# EAGLE board board (EAGLE 9.7.0)
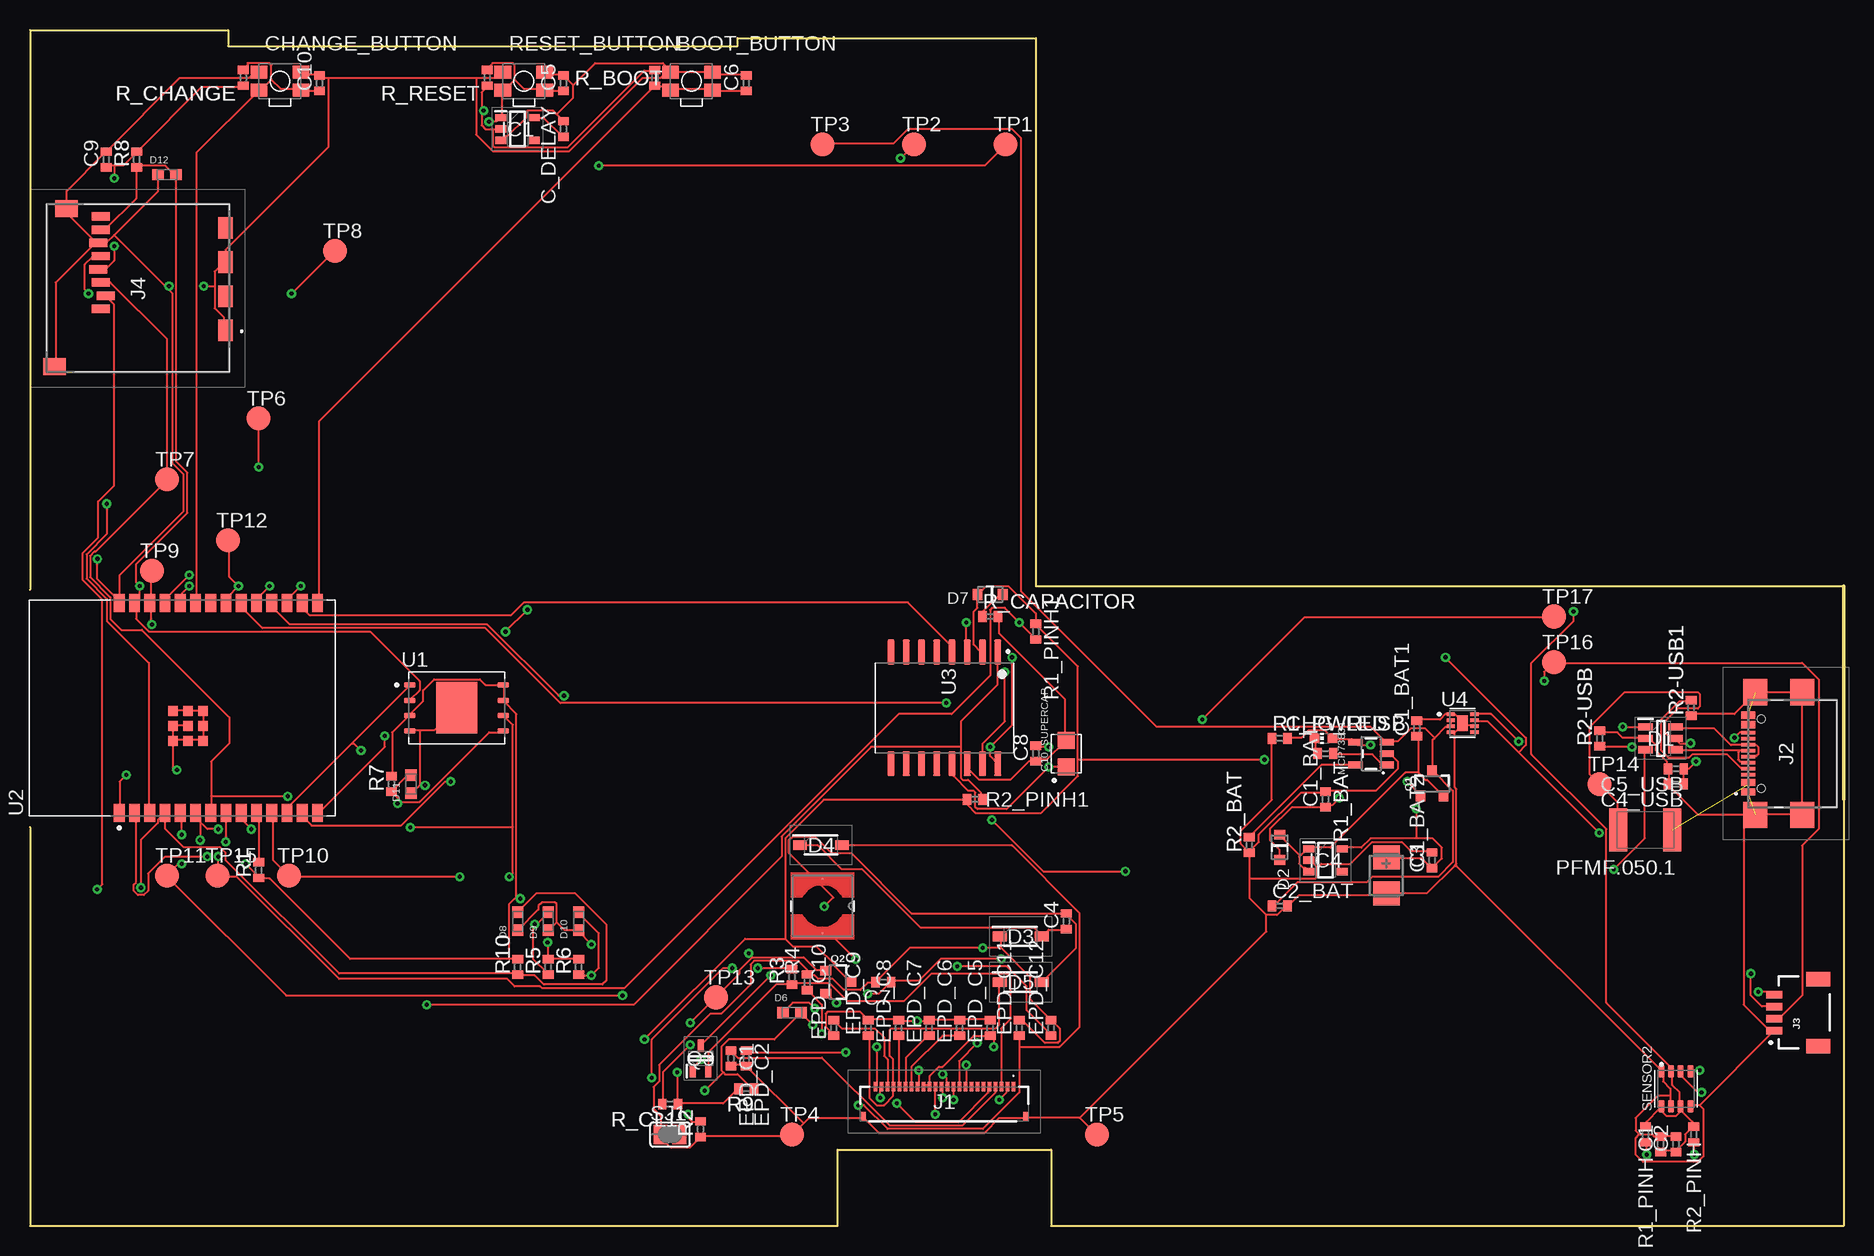
[diagram p0: board, top side]
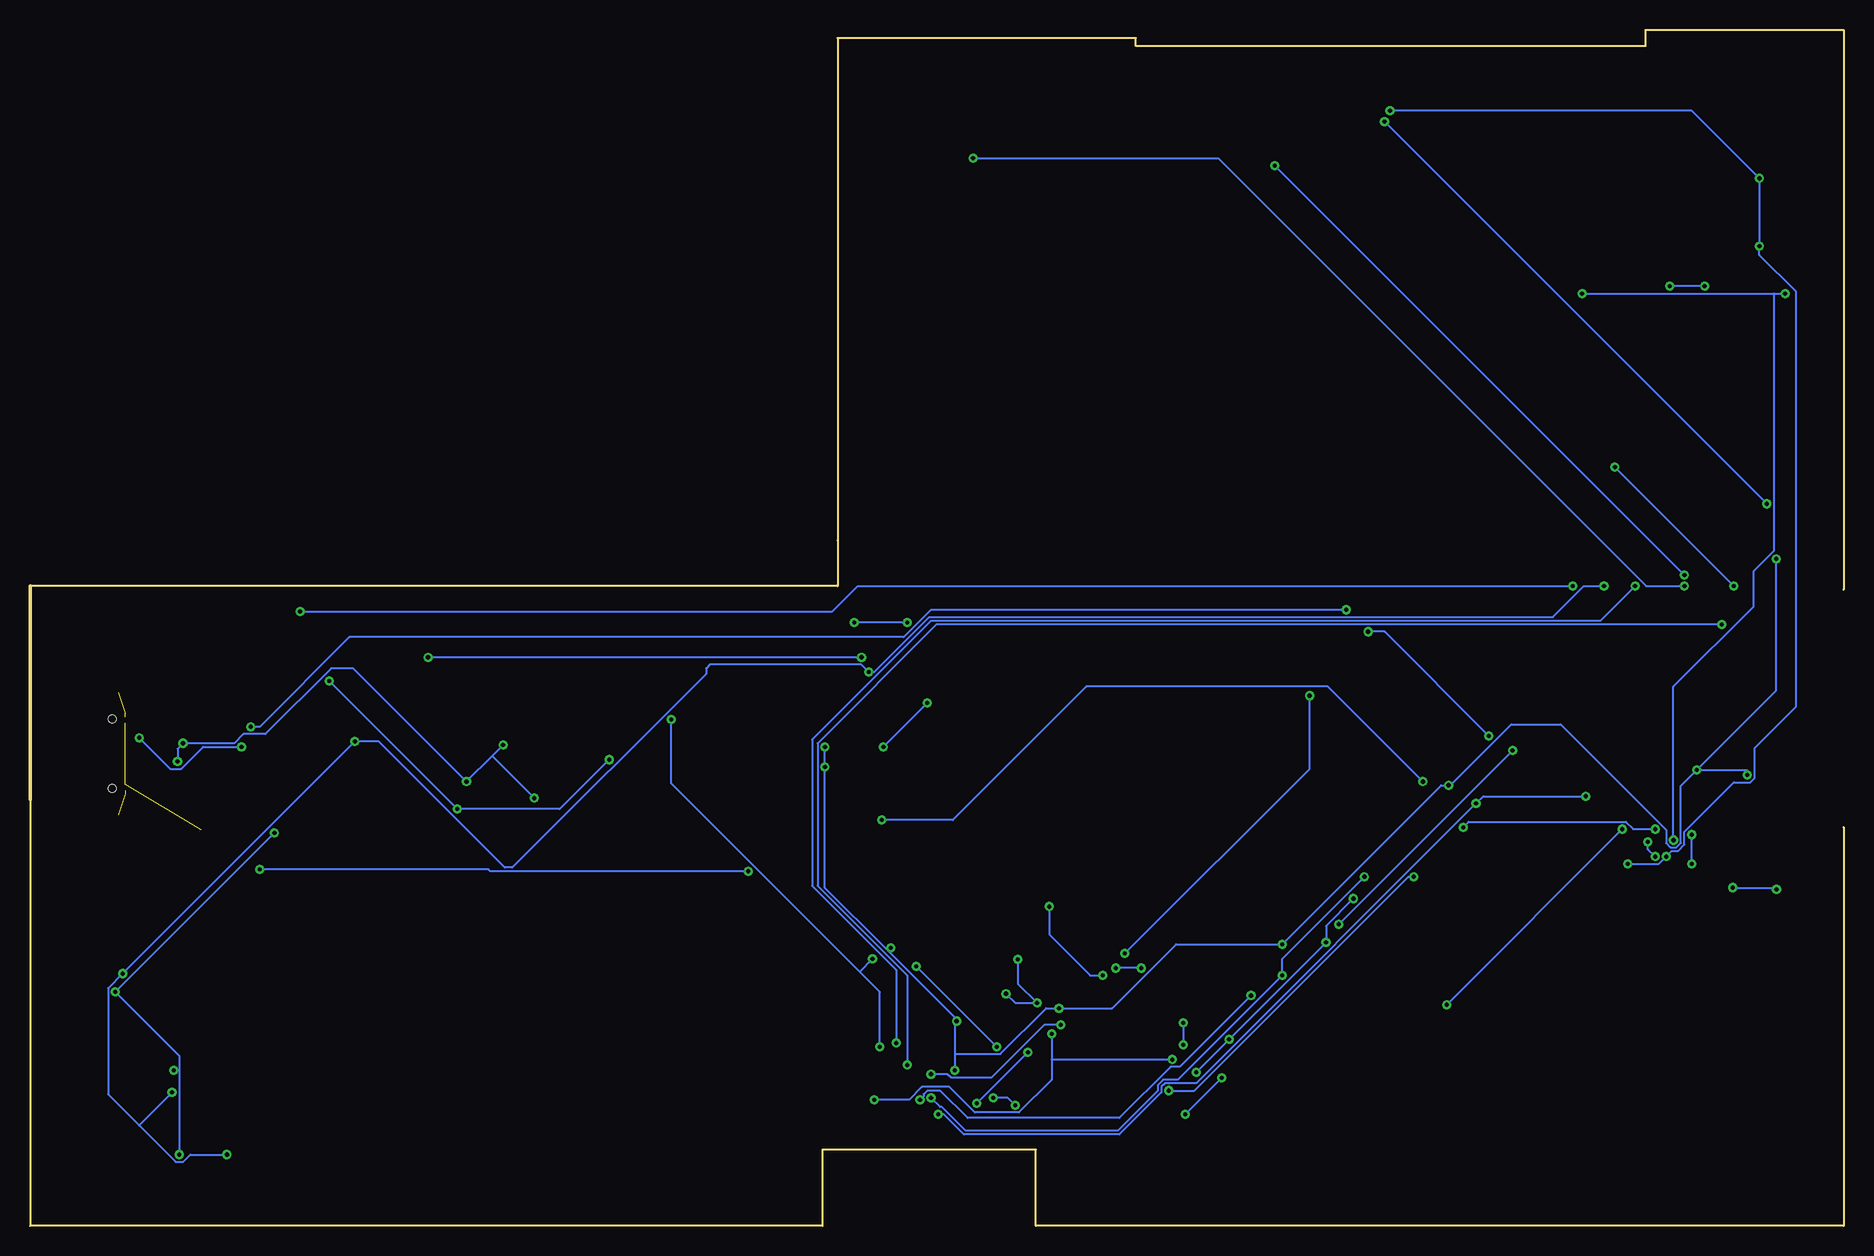
[diagram p1: board, bottom side, seen from below]

Size 151.13 x 99.69 mm. Coordinates in mm from the lower left corner, seen from the top.
Outline: 151.13,51.27 151.13,53.34 83.82,53.34 83.82,57.15 83.82,99.02 58.97,99.02 58.97,98.35 16.51,98.35 16.51,99.69 0,99.69 0,53.03
Outline: 151.13,51.27 151.13,50.8
Outline: 151.13,50.8 151.13,51.27
Outline: 151.13,50.8 151.13,35.56 151.13,0 85.09,0 85.09,6.35 67.31,6.35 67.31,0 0,0 0,33.23
Copper layers (1*16): Top 0.035mm / dielectric 1.5mm / Bottom 0.035mm
Design rules "Fusion Electronics Design Rules": minimum track width 6mil, minimum drill 0.35mm, track to track 6mil, track to pad 6mil, pad to pad 6mil, via to via 6mil, smd to smd 6mil, copper to edge 40mil, drill to drill 6mil, minimum pad ring 10mil, minimum via ring 8mil, stop-mask expansion 4mil, vias tented up to drill 9999mil, thermal gap 10mil

## Footprints (pad centres in the part's own frame; a part is rotated, then mirrored left to right if it is on the bottom)
MYBUTTON = smd 1.4 x 1.05: 1 1.75,0.75; 2 -1.75,0.75; 3 -1.75,-0.75; 4 1.75,-0.75
EAGLE-LTSPICE_C0402 = smd 0.7 x 0.9: 1 -0.65,0; 2 0.65,0
RCL_CT3528 = smd 2 x 2.2: + -1.5,0; - 1.5,0
CAPCP3225X100N = smd 1.4 x 1.4: 1 -1.1,0; 2 1.1,0
ADAFRUIT_CHIP-LED0603 = smd 0.8 x 0.8: A 0,-0.75; C 0,0.75
SOT95P280X145-6N = smd 1.2 x 0.6: 1 -1.25,0.95; 2 -1.25,0; 3 -1.25,-0.95; 4 1.25,-0.95; 5 1.25,0; 6 1.25,0.95
ESP32_WROVER_AVX---SD0805S020S1R0_AVX_SD0805S020S1R0_0 = smd 0.8 x 0.9: 1 -1.05,0; 2 1.05,0
SOD3716X135N = smd 1.15 x 0.8: 1 -1.75,0; 2 1.75,0
DIOC1608X36N = smd 0.97 x 0.94: 1 -0.75,0; 2 0.75,0
ESP32_WROVER_EAGLE-LTSPICE_C0402 = smd 0.7 x 0.9: 1 -0.65,0; 2 0.65,0
SOT95P280X125-5N = smd 0.9 x 0.6: 1 -1.4,0.95; 2 -1.4,0; 3 -1.4,-0.95; 4 1.4,-0.95; 5 1.4,0.95
SOT95P280X120-5N = smd 0.9 x 0.6: 1 -1.4,0.95; 2 -1.4,0; 3 -1.4,-0.95; 4 1.4,-0.95; 5 1.4,0.95
FH34SRJ24S05SH99 = smd 0.3 x 0.8: 1 5.75,1.45; 2 5.25,1.45; 3 4.75,1.45; 4 4.25,1.45; 5 3.75,1.45; 6 3.25,1.45; 7 2.75,1.45; 8 2.25,1.45; 9 1.75,1.45; 10 1.25,1.45; 11 0.75,1.45; 12 0.25,1.45; 13 -0.25,1.45; 14 -0.75,1.45; 15 -1.25,1.45; 16 -1.75,1.45; 17 -2.25,1.45; 18 -2.75,1.45; 19 -3.25,1.45; 20 -3.75,1.45; 21 -4.25,1.45; 22 -4.75,1.45; 23 -5.25,1.45; 24 -5.75,1.45 | smd 0.4 x 0.8: MP1 6.75,-1.05; MP2 -6.75,-1.05
SAMACSYS_PARTS_USB4110GFA = smd 0.3 x 1.15: A1 -3.35,3.678; A4 -2.55,3.678; A5 -1.25,3.678; A6 -0.25,3.678; A7 0.25,3.678; A8 1.25,3.678; A9 2.55,3.678; A12 3.35,3.678; B1 3.05,3.678; B4 2.25,3.678; B5 1.75,3.678; B6 0.75,3.678; B7 -0.75,3.678; B8 -1.75,3.678; B9 -2.25,3.678; B12 -3.05,3.678 | smd 2.18 x 2: MP1 -5.11,-0.827; MP2 5.11,-0.827; MP3 -5.11,3.103; MP4 5.11,3.103 | hole 0.65: -2.89,2.603; 2.89,2.603
JST04_1MM_RA = smd 0.6 x 1.35: 1 -1.5,0; 2 -0.5,0; 3 0.5,0; 4 1.5,0 | smd 1.2 x 2: NC1 2.8,-3.675; NC2 -2.8,-3.675
112ATAARR03ATTEND = smd 1.8 x 1.2: G1 10.6,10.4; G2 4.9,10.4; S1 7.75,10.4; S2 2.05,10.4 | smd 1.4 x 1.9: G3 13.6,-3.85; G4 0.45,-2.85 | smd 0.7 x 1.5: P1 8.8,0; P2 7.7,0.4; P3 6.6,0; P4 5.5,-0.2; P5 4.4,0; P6 3.3,-0.2; P7 2.2,0; P8 1.1,0
IND_4828-WE-TPC_WRE = smd 0.127 x 0.127: 1 -2.286,0; 2 2.286,0
ESP32_WROVER_SPARKFUN-IC-POWER_SOT23-5 = smd 0.55 x 1.2: 1 -0.95,-1.3; 2 0,-1.3; 3 0.95,-1.3; 4 0.95,1.3; 5 -0.95,1.3
ESP32C6_VARISTOR_CT/CN1812 = smd 1.5 x 3.6: 1 -2.25,0; 2 2.25,0
ESP32_WROVER_SPARKFUN-DISCRETESEMI_SOT23-3 = smd 0.8 x 0.9: 1 -0.95,-1; 2 0.95,-1; 3 0,1.1
SOT65P210X110-3N = smd 1.05 x 0.5: 1 -1.05,0.65; 2 -1.05,-0.65; 3 1.05,0
ESP32_WROVER_EAGLE-LTSPICE_R0402 = smd 0.7 x 0.9: 1 -0.65,0; 2 0.65,0
ESP32_WROVER_BME680_PSON80P300X300X100-8N = smd 1.016 x 0.5: 1 1.458,1.2; 2 1.458,0.4; 3 1.458,-0.4; 4 1.458,-1.2; 5 -1.458,-1.22; 6 -1.458,-0.4; 7 -1.458,0.4; 8 -1.458,1.2
SJ = smd 1.168 x 1.6: 1 -0.762,0; 2 0.762,0
TP20R = smd 2 x 2: TP 0,0
SON127P600X800X80-9N = smd 0.94 x 0.44: 1 -3.895,1.905; 2 -3.895,0.635; 3 -3.895,-0.635; 4 -3.895,-1.905; 5 3.895,-1.905; 6 3.895,-0.635; 7 3.895,0.635; 8 3.895,1.905 | smd 3.4 x 4.3: 9 0,0
XCVR_ESP32-C6-WROOM-1-N8 = smd 1.5 x 0.9: 1 -8.75,5.26; 2 -8.75,3.99; 3 -8.75,2.72; 4 -8.75,1.45; 5 -8.75,0.18; 6 -8.75,-1.09; 7 -8.75,-2.36; 8 -8.75,-3.63; 9 -8.75,-4.9; 10 -8.75,-6.17; 11 -8.75,-7.44; 12 -8.75,-8.71; 13 -8.75,-9.98; 14 -8.75,-11.25; 15 8.75,-11.25; 16 8.75,-9.98; 17 8.75,-8.71; 18 8.75,-7.44; 19 8.75,-6.17; 20 8.75,-4.9; 21 8.75,-3.63; 22 8.75,-2.36; 23 8.75,-1.09; 24 8.75,0.18; 25 8.75,1.45; 26 8.75,2.72; 27 8.75,3.99; 28 8.75,5.26 | smd 0.8 x 0.8: 29_1 -2.755,0.79; 29_2 -1.505,0.79; 29_3 -0.255,0.79; 29_4 -2.755,-0.46; 29_5 -1.505,-0.46; 29_6 -0.255,-0.46; 29_7 -2.755,-1.71; 29_8 -1.505,-1.71; 29_9 -0.255,-1.71
SOIC127P1032X265-16N = smd 2.05 x 0.59: 1 -4.655,4.445; 2 -4.655,3.175; 3 -4.655,1.905; 4 -4.655,0.635; 5 -4.655,-0.635; 6 -4.655,-1.905; 7 -4.655,-3.175; 8 -4.655,-4.445; 9 4.655,-4.445; 10 4.655,-3.175; 11 4.655,-1.905; 12 4.655,-0.635; 13 4.655,0.635; 14 4.655,1.905; 15 4.655,3.175; 16 4.655,4.445
SON50P200X200X80-9N = smd 0.76 x 0.27: 1 -0.985,0.75; 2 -0.985,0.25; 3 -0.985,-0.25; 4 -0.985,-0.75; 5 0.985,-0.75; 6 0.985,-0.25; 7 0.985,0.25; 8 0.985,0.75 | smd 0.9 x 1.3: 9 0,0

## Placement (x,y rotation side)
BOOT_BUTTON  BUTTON_CUSYOMV1  [MYBUTTON]  55.12,95.42 0 top
C1  100nF  [EAGLE-LTSPICE_C0402]  135.89,6.8 90 top
C1_BAT  4.7uF  [EAGLE-LTSPICE_C0402]  107.95,35.56 90 top
C1_BAT1  4.7uF  [EAGLE-LTSPICE_C0402]  115.57,41.46 90 top
C1_BAT2  4.7uF  [EAGLE-LTSPICE_C0402]  116.84,30.48 90 top
C2  100nF  [EAGLE-LTSPICE_C0402]  137.16,6.8 90 top
C2_BAT  4.7uF  [EAGLE-LTSPICE_C0402]  104.14,26.67 0 top
C3  100uF TANT  [RCL_CT3528]  113.03,29.21 270 top
C4  4.7uF/25V  [EAGLE-LTSPICE_C0402]  86.36,25.4 90 top
C4_USB  100nF  [EAGLE-LTSPICE_C0402]  137.16,36.83 180 top
C5  1uF  [EAGLE-LTSPICE_C0402]  44.45,95.25 90 top
C5_USB  4.7uF  [EAGLE-LTSPICE_C0402]  137.16,38.1 180 top
C6  100nF  [EAGLE-LTSPICE_C0402]  59.69,95.25 90 top
C7  10uF  [EAGLE-LTSPICE_C0402]  71.12,20.32 180 top
C8  100nF  [EAGLE-LTSPICE_C0402]  83.82,39.37 90 top
C9  100nF  [EAGLE-LTSPICE_C0402]  6.35,88.9 90 top
C10  100nF  [EAGLE-LTSPICE_C0402]  24.13,95.25 90 top
C10_SUPERCAP  CPH3225A  [CAPCP3225X100N]  86.36,39.37 90 top
C_DELAY  100nF  [EAGLE-LTSPICE_C0402]  44.45,91.44 90 top
CHANGE_BUTTON  BUTTON_CUSYOMV1  [MYBUTTON]  20.83,95.42 0 top
CHG_LED  [ADAFRUIT_CHIP-LED0603]  107.8,40.64 90 top
D1  USBLC6-2SC6Y  [SOT95P280X145-6N]  135.89,40.64 0 top
D2  ESP32_WROVER_AVX---SD0805S020S1R0_AVX_SD0805S020S1R0_0_0AVX_SD0805S020S1R0_0_0  [ESP32_WROVER_AVX---SD0805S020S1R0_AVX_SD0805S020S1R0_0]  104.14,31.55 270 top
D3  MBR0530  [SOD3716X135N]  82.55,24.13 0 top
D4  MBR0530  [SOD3716X135N]  65.92,31.75 0 top
D5  MBR0530  [SOD3716X135N]  82.55,20.32 0 top
D6  PGB1010603MR  [DIOC1608X36N]  63.5,17.78 0 top
D7  ESP32_WROVER_AVX---SD0805S020S1R0_AVX_SD0805S020S1R0_0_0AVX_SD0805S020S1R0_0_0  [ESP32_WROVER_AVX---SD0805S020S1R0_AVX_SD0805S020S1R0_0]  80.01,52.63 180 top
D8  PGB1010603MR  [DIOC1608X36N]  40.64,25.4 90 top
D9  PGB1010603MR  [DIOC1608X36N]  43.18,25.4 90 top
D10  PGB1010603MR  [DIOC1608X36N]  45.72,25.4 90 top
D11  PGB1010603MR  [DIOC1608X36N]  31.75,36.83 90 top
D12  PGB1010603MR  [DIOC1608X36N]  11.43,87.63 0 top
EPD_C1  1uF/50V  [ESP32_WROVER_EAGLE-LTSPICE_C0402]  58.42,13.97 270 top
EPD_C2  1uF/50V  [ESP32_WROVER_EAGLE-LTSPICE_C0402]  59.69,13.97 270 top
EPD_C5  0.1uF/50V  [ESP32_WROVER_EAGLE-LTSPICE_C0402]  80.01,16.51 90 top
EPD_C6  1uF/50V  [ESP32_WROVER_EAGLE-LTSPICE_C0402]  77.47,16.51 90 top
EPD_C7  1uF/50V  [ESP32_WROVER_EAGLE-LTSPICE_C0402]  74.93,16.51 90 top
EPD_C8  1uF/50V  [ESP32_WROVER_EAGLE-LTSPICE_C0402]  72.39,16.51 90 top
EPD_C9  1uF/50V  [ESP32_WROVER_EAGLE-LTSPICE_C0402]  69.85,16.51 90 top
EPD_C10  1uF/50V  [ESP32_WROVER_EAGLE-LTSPICE_C0402]  66.98,16.51 270 top
EPD_C11  1uF/50V  [ESP32_WROVER_EAGLE-LTSPICE_C0402]  82.44,16.51 90 top
EPD_C12  1uF/50V  [ESP32_WROVER_EAGLE-LTSPICE_C0402]  85.09,16.51 90 top
IC1  BD5229G-TR  [SOT95P280X125-5N]  40.64,91.44 0 top
IC4  XC6220A331MR-G  [SOT95P280X120-5N]  107.95,30.48 0 top
J1  FH34SRJ-24S-0.5SH_99_  [FH34SRJ24S05SH99]  76.2,10.16 0 top
J2  SAMACSYS_PARTS_USB4110-GF-A  [SAMACSYS_PARTS_USB4110GFA]  146.87,39.37 90 top
J3  QWIIC_RIGHT_ANGLE  [JST04_1MM_RA]  145.36,17.78 90 top
J4  112A-TAAR-R03_ATTEND  [112ATAARR03ATTEND]  5.89,85.24 270 top
L1  68uH  [IND_4828-WE-TPC_WRE]  66.04,26.67 270 top
MCP73831  ESP32_WROVER_SPARKFUN-IC-POWER_MCP73831  [ESP32_WROVER_SPARKFUN-IC-POWER_SOT23-5]  111.76,39.37 90 top
PFMF.050.1  ESP32C6_VARISTORCN1812  [ESP32C6_VARISTOR_CT/CN1812]  134.62,33.02 180 top
Q1  20V/4.2A/52mΩ/1.4W  [ESP32_WROVER_SPARKFUN-DISCRETESEMI_SOT23-3]  116.84,36.83 0 top
Q2  20V/4.2A/52mΩ/1.4W  [ESP32_WROVER_SPARKFUN-DISCRETESEMI_SOT23-3]  67.31,20.32 270 top
Q3  SI1308EDL-T1-GE3  [SOT65P210X110-3N]  55.88,13.97 90 top
R1  10K  [ESP32_WROVER_EAGLE-LTSPICE_R0402]  19.05,29.66 90 top
R1_BAT  200  [ESP32_WROVER_EAGLE-LTSPICE_R0402]  107.95,39.37 180 top
R1_PINH  10K  [ESP32_WROVER_EAGLE-LTSPICE_R0402]  134.62,7.62 90 top
R1_PINH1  10K  [ESP32_WROVER_EAGLE-LTSPICE_R0402]  83.82,49.53 90 top
R1_PWRUSB  100K  [ESP32_WROVER_EAGLE-LTSPICE_R0402]  104.14,40.64 0 top
R2  2.2  [ESP32_WROVER_EAGLE-LTSPICE_R0402]  55.88,8.07 90 top
R2-USB  5k1  [ESP32_WROVER_EAGLE-LTSPICE_R0402]  130.81,40.64 90 top
R2-USB1  5k1  [ESP32_WROVER_EAGLE-LTSPICE_R0402]  138.43,43.18 90 top
R2_BAT  2K  [ESP32_WROVER_EAGLE-LTSPICE_R0402]  101.6,31.75 90 top
R2_PINH  10K  [ESP32_WROVER_EAGLE-LTSPICE_R0402]  138.65,7.62 90 top
R2_PINH1  10K  [ESP32_WROVER_EAGLE-LTSPICE_R0402]  78.74,35.56 180 top
R3  0.47  [ESP32_WROVER_EAGLE-LTSPICE_R0402]  63.5,20.77 90 top
R4  10K  [ESP32_WROVER_EAGLE-LTSPICE_R0402]  64.77,20.32 90 top
R5  10K  [ESP32_WROVER_EAGLE-LTSPICE_R0402]  43.18,21.59 90 top
R6  10K  [ESP32_WROVER_EAGLE-LTSPICE_R0402]  45.72,21.59 90 top
R7  10K  [ESP32_WROVER_EAGLE-LTSPICE_R0402]  30.13,36.83 90 top
R8  10K  [ESP32_WROVER_EAGLE-LTSPICE_R0402]  8.89,88.9 90 top
R9  10K  [ESP32_WROVER_EAGLE-LTSPICE_R0402]  59.69,11.43 180 top
R10  10K  [ESP32_WROVER_EAGLE-LTSPICE_R0402]  40.64,21.59 90 top
R_BOOT  10K  [ESP32_WROVER_EAGLE-LTSPICE_R0402]  52.07,95.7 270 top
R_CAPACITOR  15  [ESP32_WROVER_EAGLE-LTSPICE_R0402]  80.01,50.8 0 top
R_CHANGE  10K  [ESP32_WROVER_EAGLE-LTSPICE_R0402]  17.78,95.7 90 top
R_CL1  10K  [ESP32_WROVER_EAGLE-LTSPICE_R0402]  53.34,10.16 180 top
R_RESET  10K  [ESP32_WROVER_EAGLE-LTSPICE_R0402]  38.1,95.7 90 top
RESET_BUTTON  BUTTON_CUSYOMV1  [MYBUTTON]  41.15,95.42 0 top
SENSOR2  ESP32_WROVER_BME680_BME680  [ESP32_WROVER_BME680_PSON80P300X300X100-8N]  137.16,11.43 90 top
SJ1  [SJ]  53.34,7.62 0 top
TP1  TPTP20R  [TP20R]  81.28,90.17 0 top
TP2  TPTP20R  [TP20R]  73.66,90.17 0 top
TP3  TPTP20R  [TP20R]  66.04,90.17 0 top
TP4  TPTP20R  [TP20R]  63.5,7.62 0 top
TP5  TPTP20R  [TP20R]  88.9,7.62 0 top
TP6  TPTP20R  [TP20R]  19.05,67.31 0 top
TP7  TPTP20R  [TP20R]  11.43,62.23 0 top
TP8  TPTP20R  [TP20R]  25.4,81.28 0 top
TP9  TPTP20R  [TP20R]  10.16,54.61 0 top
TP10  TPTP20R  [TP20R]  21.59,29.21 0 top
TP11  TPTP20R  [TP20R]  11.43,29.21 0 top
TP12  TPTP20R  [TP20R]  16.51,57.15 0 top
TP13  TPTP20R  [TP20R]  57.15,19.05 0 top
TP14  TPTP20R  [TP20R]  130.81,36.83 0 top
TP15  TPTP20R  [TP20R]  15.63,29.21 0 top
TP16  TPTP20R  [TP20R]  127,46.99 0 top
TP17  TPTP20R  [TP20R]  127,50.8 0 top
U1  W25Q512JVEIQ  [SON127P600X800X80-9N]  35.56,43.18 0 top
U2  ESP32-C6-WROOM-1-N8  [XCVR_ESP32-C6-WROOM-1-N8]  12.7,43.18 90 top
U3  DS3231SN#  [SOIC127P1032X265-16N]  76.2,43.18 270 top
U4  MAX17048G+T10  [SON50P200X200X80-9N]  119.38,41.91 0 top

## Library data of the parts
BOOT_BUTTON CHANGE_BUTTON CHG_LED PFMF.050.1 RESET_BUTTON SJ1 TP1-TP17 = openbook_library
C1 C1_BAT C1_BAT1 C1_BAT2 C2 C2_BAT C4 C4_USB C5 C5_USB C6-C10 C_DELAY EPD_C1 EPD_C2 EPD_C5-EPD_C9 EPD_C11 EPD_C12 = openbook_library; SPICEMODEL: NONE; SPICEPREFIX: C
C3 = openbook_library; SPICEPREFIX: C
C10_SUPERCAP = openbook_library; AVAILABILITY: Not in stock; CHECK_PRICES: https://www.snapeda.com/parts/CPH3225A/Seiko+Instruments/view-part/?ref=eda; DESCRIPTION: 11 mF (EDLC) Supercapacitor 3.3 V 1210 (3225 Metric) - -; MF: Seiko Instruments; MP: CPH3225A; PACKAGE: 1210 Seiko; PRICE: None; PURCHASE-URL: https://www.snapeda.com/api/url_track_click_mouser/?unipart_id=562593&manufacturer=Seiko Instruments&part_name=CPH3225A&search_term=None; SNAPEDA_LINK: https://www.snapeda.com/parts/CPH3225A/Seiko+Instruments/view-part/?ref=snap
D1 = openbook_library; AVAILABILITY: In Stock; CHECK_PRICES: https://www.snapeda.com/parts/USBLC6-2SC6Y/STMicroelectronics/view-part/?ref=eda; DESCRIPTION: 17V Clamp 5A (8/20µs) Ipp Tvs Diode Surface Mount SOT-23-6; MF: STMicroelectronics; MP: USBLC6-2SC6Y; PACKAGE: SOT-23-6 STMicroelectronics; PRICE: None; SNAPEDA_LINK: https://www.snapeda.com/parts/USBLC6-2SC6Y/STMicroelectronics/view-part/?ref=snap
D2 D7 = openbook_library; CENTROID_NOT_SPECIFIED: No; DATASHEET: http://datasheets.avx.com/schottky.pdf; DIGIKEY_DESCRIPTION: DIODE SCHOTTKY 20V 1A 0805; DIGIKEY_PART_NUMBER: 478-7800-1-ND; LEAD_FREE: yes; MF: AVX; MOUSER_PART_NUMBER: 581-SD0805S020S1R0; PACKAGE: 0805 (2012 metric); PREFIX: D; ROHS: yes; TEMPERATURE_RANGE_HIGH: +125°C; TEMPERATURE_RANGE_LOW: -55°C
D3-D5 = openbook_library; AVAILABILITY: In Stock; CHECK_PRICES: https://www.snapeda.com/parts/MBR0530/Onsemi/view-part/?ref=eda; DESCRIPTION: Diode Schottky 30 V 500mA Surface Mount SOD-123; MF: ON Semiconductor; MP: MBR0530; PACKAGE: SOD-123-2 ON Semiconductor; PRICE: None; PURCHASE-URL: https://www.snapeda.com/api/url_track_click_mouser/?unipart_id=179458&manufacturer=ON Semiconductor&part_name=MBR0530&search_term=None; SNAPEDA_LINK: https://www.snapeda.com/parts/MBR0530/Onsemi/view-part/?ref=snap
D6 D8-D12 = openbook_library; AVAILABILITY: In Stock; CHECK_PRICES: https://www.snapeda.com/parts/PGB1010603MR/Littelfuse/view-part/?ref=eda; DESCRIPTION: 150V (Typ) Clamp - Ipp Tvs Diode Surface Mount 0603 (1608 Metric); MF: Littelfuse Inc.; MP: PGB1010603MR; PACKAGE: 0603 Littelfuse Inc.; PRICE: None; PURCHASE-URL: https://www.snapeda.com/api/url_track_click_mouser/?unipart_id=5659453&manufacturer=Littelfuse Inc.&part_name=PGB1010603MR&search_term=None; SNAPEDA_LINK: https://www.snapeda.com/parts/PGB1010603MR/Littelfuse/view-part/?ref=snap
EPD_C10 = openbook_library; SPICEMODEL: NONE; SPICEPREFIX: EPD_C10
IC1 = openbook_library; DESCRIPTION: Voltage Detector with Adjustable Delay Time: CMOS processes are utilized to develop high precision, low current consumption CMOS reset ICs that allow arbitrary setting of the delay time. The extensive lineup includes both Nch Open Drain and CMOS output types in a wide range of detection voltages (from 2.3V to 6.0V, in 0.1V steps), enabling selection of the ideal solution based on customer requirements. In addition, the entire series is of course both lead-free and RoHS-compliant.; HEIGHT: 1.25mm; MANUFACTURER_NAME: ROHM Semiconductor; MANUFACTURER_PART_NUMBER: BD5229G-TR; MOUSER_PART_NUMBER: 755-BD5229G-TR; MOUSER_PRICE-STOCK: https://www.mouser.co.uk/ProductDetail/ROHM-Semiconductor/BD5229G-TR?qs=4kLU8WoGk0vvnhrrYwdszw%3D%3D
IC4 = openbook_library; DESCRIPTION: LDO Voltage Regulators; HEIGHT: 1.2mm; MANUFACTURER_NAME: Torex; MANUFACTURER_PART_NUMBER: XC6220A331MR-G; MOUSER_PART_NUMBER: 865-XC6220A331MR-G; MOUSER_PRICE-STOCK: https://www.mouser.co.uk/ProductDetail/Torex-Semiconductor/XC6220A331MR-G?qs=AsjdqWjXhJ8ZSWznL1J0gg%3D%3D
J1 = openbook_library; DESCRIPTION: 24 Position FFC, FPC Connector Contacts, Top and Bottom 0.020" (0.50mm) Surface Mount, Right Angle; HEIGHT: 1.1mm; MANUFACTURER_NAME: Hirose; MANUFACTURER_PART_NUMBER: FH34SRJ-24S-0.5SH(99); MOUSER_PART_NUMBER: 798-FH34SRJ24S05SH99; MOUSER_PRICE-STOCK: https://www.mouser.co.uk/ProductDetail/Hirose-Connector/FH34SRJ-24S-0.5SH99?qs=vcbW%252B4%252BSTIpKBl5ap9J8Fw%3D%3D
J2 = openbook_library; DESCRIPTION: CONN USB 2.0 TYPE-C R/A SMT; HEIGHT: 3.26mm; MANUFACTURER_NAME: GCT (GLOBAL CONNECTOR TECHNOLOGY); MANUFACTURER_PART_NUMBER: USB4110-GF-A; MOUSER_PART_NUMBER: 640-USB4110-GF-A; MOUSER_PRICE-STOCK: https://www.mouser.co.uk/ProductDetail/GCT/USB4110-GF-A?qs=KUoIvG%2F9IlYiZvIXQjyJeA%3D%3D
J3 = openbook_library; PROD_ID: CONN-13694
J4 = openbook_library; DESCRIPTION: Micro SD Card Socket, Push-Push Type, Top Mount, SMT, H=1.83mm, 10u; HEIGHT: 1.9mm; MANUFACTURER_NAME: ATTEND; MANUFACTURER_PART_NUMBER: 112A-TAAR-R03 ATTEND
L1 = openbook_library; COPYRIGHT: Copyright (C) 2024 Ultra Librarian. All rights reserved.; MANUFACTURER_PART_NUMBER: 744043680; MFR_NAME: Wurth Electronics
MCP73831 = openbook_library; PROD_ID: IC-09995
Q1 Q2 = openbook_library; PROD_ID: TRAN-14388
Q3 = openbook_library; AVAILABILITY: In Stock; CHECK_PRICES: https://www.snapeda.com/parts/SI1308EDL-T1-GE3/Vishay+Siliconix/view-part/?ref=eda; DESCRIPTION: Si1308EDL-T1-GE3 N-channel MOSFET Transistor, 1.5 A, 30 V, 3-Pin SC-70 | Siliconix / Vishay SI1308EDL-T1-GE3; MF: Vishay Siliconix; MP: SI1308EDL-T1-GE3; PACKAGE: SOT-323 Vishay Semiconductor; PRICE: None; PURCHASE-URL: https://www.snapeda.com/api/url_track_click_mouser/?unipart_id=274603&manufacturer=Vishay Siliconix&part_name=SI1308EDL-T1-GE3&search_term=None; SNAPEDA_LINK: https://www.snapeda.com/parts/SI1308EDL-T1-GE3/Vishay+Siliconix/view-part/?ref=snap
R1 R1_BAT R1_PINH R1_PINH1 R1_PWRUSB R2 R2-USB R2-USB1 R2_BAT R2_PINH R2_PINH1 R3-R10 R_BOOT R_CAPACITOR R_CHANGE R_CL1 R_RESET = openbook_library; SPICEMODEL: NONE; SPICEPREFIX: R
SENSOR2 = openbook_library; AVAILABILITY: Unavailable; DESCRIPTION: Integrated Environmental Unit; MF: Bosch Sensortec; MP: BME680; PACKAGE: LGA-8 Bosch Tools; PRICE: None
U1 = openbook_library; AVAILABILITY: In Stock; CHECK_PRICES: https://www.snapeda.com/parts/W25Q512JVEIQ/Winbond+Electronics/view-part/?ref=eda; DESCRIPTION: FLASH - NOR Memory IC 512Mb (64M x 8) SPI - Quad I/O 133 MHz 8-WSON (8x6); MF: Winbond Electronics; MP: W25Q512JVEIQ; PACKAGE: Package; PRICE: None; SNAPEDA_LINK: https://www.snapeda.com/parts/W25Q512JVEIQ/Winbond+Electronics/view-part/?ref=snap
U2 = openbook_library; AVAILABILITY: In Stock; CHECK_PRICES: https://www.snapeda.com/parts/ESP32-C6-WROOM-1-N8/Espressif+Systems/view-part/?ref=eda; DESCRIPTION: Multiprotocol Modules ESP32-C6 module, Wi-Fi 6 in 2.4 GHz band, Bluetooth 5, Zigbee 3.0 and Thread. ESP34-WROOM Compatible - ENGINEERING SAMPLE; MF: Espressif Systems; MP: ESP32-C6-WROOM-1-N8; PACKAGE: None; PRICE: None; SNAPEDA_LINK: https://www.snapeda.com/parts/ESP32-C6-WROOM-1-N8/Espressif+Systems/view-part/?ref=snap
U3 = openbook_library; AVAILABILITY: In Stock; CHECK_PRICES: https://www.snapeda.com/parts/DS3231SN%23/Analog+Devices/view-part/?ref=eda; DESCRIPTION: Extremely Accurate I²C-Integrated RTC/TCXO/Crystal; MF: Analog Devices; MP: DS3231SN#; PACKAGE: SOIC-16 Maxim; PRICE: None; PURCHASE-URL: https://www.snapeda.com/api/url_track_click_mouser/?unipart_id=99048&manufacturer=Analog Devices&part_name=DS3231SN#&search_term=None; SNAPEDA_LINK: https://www.snapeda.com/parts/DS3231SN%23/Analog+Devices/view-part/?ref=snap
U4 = openbook_library; AVAILABILITY: In Stock; CHECK_PRICES: https://www.snapeda.com/parts/MAX17048G+T10/Analog+Devices/view-part/?ref=eda; DESCRIPTION: 3µA 1-Cell/2-Cell Fuel Gauge with ModelGauge; MF: Analog Devices; MP: MAX17048G+T10; PACKAGE: TDFN-8 Maxim; PRICE: None; PURCHASE-URL: https://www.snapeda.com/api/url_track_click_mouser/?unipart_id=329239&manufacturer=Analog Devices&part_name=MAX17048G+T10&search_term=None; SNAPEDA_LINK: https://www.snapeda.com/parts/MAX17048G+T10/Analog+Devices/view-part/?ref=snap

## Nets
3V3: C1_BAT2.1 C3.+ C9.1 D7.2 IC1.2 IC4.5 J3.2 J4.P4 Q2.3 R1.1 R1_PINH1.2 R2_PINH1.2 R5.2 R6.2 R7.2 R8.2 R9.2 R10.2 R_BOOT.1 R_CHANGE.1 R_CL1.1 R_RESET.1 TP16.TP U1.3 U1.7 U1.8 U2.2 U3.2
32KHZ: R2_PINH1.1 U2.9 U3.1
DN: D1.4 J2.A7 J2.B7
DP: D1.6 J2.A6 J2.B6
EPD_3V3: C7.1 EPD_C5.1 J1.15 J1.16 L1.2 Q2.2 TP17.TP
EPD_3V3_C: Q2.1 R_CL1.2 TP13.TP U2.18
EPD_BUSY: J1.9 TP9.TP U2.26
EPD_CS: D6.2 J1.12 R9.1 TP10.TP U2.11
EPD_DC: J1.11 TP11.TP U2.5
EPD_RST: J1.10 TP12.TP U2.21
FLASH_CS: D9.2 R5.1 U1.1 U2.12
GDR: J1.2 Q3.1 R4.1
GND: BOOT_BUTTON.1 BOOT_BUTTON.2 C1.2 C1_BAT1.2 C1_BAT2.2 C1_BAT.2 C2.2 C2_BAT.2 C3.- C4_USB.2 C5.2 C5_USB.2 C6.2 C7.2 C8.2 C9.2 C10.2 C10_SUPERCAP.1 C_DELAY.2 CHANGE_BUTTON.1 CHANGE_BUTTON.2 D1.2 D3.1 D6.1 D8.1 D9.1 D10.1 D11.1 D12.1 EPD_C1.2 EPD_C2.2 EPD_C5.2 EPD_C6.2 EPD_C7.2 EPD_C8.2 EPD_C9.2 EPD_C10.2 EPD_C11.2 EPD_C12.2 IC1.3 IC4.2 J1.17 J1.MP1 J1.MP2 J2.A1 J2.A12 J2.B1 J2.B12 J2.MP1 J2.MP2 J2.MP3 J2.MP4 J3.1 J4.G1 J4.G2 J4.G3 J4.G4 J4.P6 MCP73831.2 R1_PWRUSB.1 R2-USB1.1 R2-USB.2 R2.1 R2_BAT.1 R4.2 RESET_BUTTON.1 RESET_BUTTON.2 SENSOR2.1 SENSOR2.5 SENSOR2.7 SJ1.1 TP4.TP TP5.TP U1.4 U1.9 U2.1 U2.28 U2.29_1 U2.29_2 U2.29_3 U2.29_4 U2.29_5 U2.29_6 U2.29_7 U2.29_8 U2.29_9 U3.13 U4.1 U4.4 U4.6 U4.9
GPIO8: R1.2 U2.10
I2C_PW: C1.1 C2.1 R1_PINH.2 R2_PINH.2 SENSOR2.2 SENSOR2.6 SENSOR2.8 U2.17
INT_RTC: R1_PINH1.1 TP15.TP U2.8 U3.3
IO/BOOT: BOOT_BUTTON.3 BOOT_BUTTON.4 C6.1 R_BOOT.2 U2.15
IO/CHANGE: C10.1 CHANGE_BUTTON.3 CHANGE_BUTTON.4 R_CHANGE.2 U2.23
MISO: D12.2 J4.P7 R8.1 TP6.TP U1.2 U2.27
MOSI: D11.2 J1.14 J4.P3 R7.1 TP7.TP U1.5 U2.7
N$1: EPD_C10.1 J1.22
N$2: EPD_C8.1 J1.20
N$3: EPD_C6.1 J1.18
N$4: C4.1 D3.2 D4.1
N$5: EPD_C7.1 J1.19
N$6: EPD_C1.1 J1.4
N$7: EPD_C2.1 J1.5
N$8: J2.B5 R2-USB.1
N$9: J2.A5 R2-USB1.2
N$10: EPD_C12.1 J1.24
N$11: C1_BAT1.1 D2.1 IC4.1 IC4.3 Q1.2
N$13: MCP73831.1 R1_BAT.1
N$14: CHG_LED.C R1_BAT.2
N$15: MCP73831.5 R2_BAT.2
N$17: C_DELAY.1 IC1.5
N$18: D7.1 R_CAPACITOR.1
PREVGH: D5.1 EPD_C9.1 J1.21
PREVGL: D4.2 EPD_C11.1 J1.23
RESE: J1.3 Q3.2 R3.1
RESE': R2.2 R3.2 SJ1.2
RESET: C5.1 IC1.1 R_RESET.2 RESET_BUTTON.3 RESET_BUTTON.4 U2.3
RTC_RST: U2.16 U3.4
RX: TP2.TP U2.24
SCK: D10.2 J1.13 J4.P5 R6.1 TP8.TP U1.6 U2.6
SCL: J3.4 R2_PINH.1 SENSOR2.4 U2.20 U3.16 U4.7
SDA: J3.3 R1_PINH.1 SENSOR2.3 U2.19 U3.15 U4.8
SRC: C4.2 D5.2 L1.1 Q3.3
SS_SD: D8.2 J4.P2 R10.1 U2.4
TX: TP1.TP U2.25
USB_D+: D1.1 U2.14
USB_D-: D1.3 U2.13
VBAT: C2_BAT.1 MCP73831.3 Q1.3 TP3.TP U4.2 U4.3
VBUS: C1_BAT.1 C4_USB.1 C5_USB.1 CHG_LED.A D1.5 D2.2 MCP73831.4 PFMF.050.1.2 Q1.1 R1_PWRUSB.2 TP14.TP
VRTC: C8.1 C10_SUPERCAP.2 R_CAPACITOR.2 U3.14
VUSB: J2.A4 J2.A9 J2.B4 J2.B9 PFMF.050.1.1

## Tracks (layer width: path | path; a pad name or v marks a point on that pad's centre or on a via)
3V3  (via drill 0.35)
  Top 0.152: 115.52,32.31 116.89,32.31 117.65,31.55 117.65,30.63 116.89,29.87 C1_BAT2.1 116.74,29.87 115.98,30.63 113.08,30.63 C3.+ | 115.52,32.31 111.71,32.31 110.95,31.55 109.42,31.55 IC4.5 | J3.2 145.39,17.37 145.85,17.37 147.68,19.2 147.68,31.7 149.05,33.07 149.05,45.57 147.68,46.94 127.1,46.94 TP16.TP 126.95,46.94 126.19,46.18 v126.19,45.41 | v115.52,34.75 115.52,32.31 | 38.56,91.44 37.95,91.44 37.64,91.75 37.64,92.96 | 38.56,91.44 39.17,91.44 IC1.2 | 37.64,92.96 37.64,94.49 38.1,94.94 R_RESET.1 | 38.56,91.44 38.56,90.07 38.71,89.92 44.81,89.92 51.21,96.32 51.97,96.32 R_BOOT.1 | 7.01,88.39 7.77,88.39 8.84,89.46 R8.2 8.99,89.61 14.33,94.94 17.68,94.94 R_CHANGE.1 | 7.01,88.39 6.4,88.39 C9.1 | v7.01,81.69 7.01,80.47 6.4,79.86 5.79,79.86 J4.P4 | 7.01,88.39 v7.01,87.33 | v37.8,92.96 37.64,92.96 | U3.2 79.25,47.85 78.64,48.46 78.64,51.21 78.94,51.51 78.94,52.58 D7.2 79.1,52.73 79.7,53.34 81.53,53.34 83.82,51.05 83.82,50.29 R1_PINH1.2 83.82,50.14 87.33,46.63 87.33,38.86 | 62.94,23.93 63.55,23.32 65.53,23.32 67.06,21.79 67.06,21.64 68.28,20.42 Q2.3 | 62.94,23.93 62.94,32.31 66.14,35.51 78.03,35.51 R2_PINH1.2 78.18,35.51 78.18,35.05 78.79,34.44 84.28,34.44 87.33,37.49 87.33,38.86 | R7.2 30.18,37.49 30.18,41.15 31.55,42.52 U1.3 31.7,42.67 32.77,43.74 32.77,44.65 33.68,45.57 37.49,45.57 37.95,45.11 39.32,45.11 U1.8 39.47,44.96 39.47,43.89 U1.7 39.47,43.74 40.54,42.67 40.54,27.28 | R9.2 58.98,11.43 57.76,10.21 54.1,10.21 R_CL1.1 53.95,10.21 v53.95,12.8 | R6.2 43.28,22.25 R5.2 43.13,22.25 v43.13,23.62 | 39.93,22.25 40.54,22.25 R10.2 | 39.93,22.25 26.67,22.25 19.96,28.96 19.05,28.96 R1.1 19.05,29.11 v17.98,30.18
  Top 0.152: U2.2 8.84,34.29 8.84,28.65 8.64,28.45 8.64,27.94 8.99,27.59 9.5,27.59 9.85,27.94 9.85,29.37 11.27,30.79 v14.78,30.79 | 40.54,27.28 40.39,27.28 39.93,26.82 39.93,22.25 | 40.54,27.28 v40.84,27.28 40.54,27.28 | 62.94,23.93 59.59,23.93 v51.21,15.54 | 87.33,38.86 v102.87,38.86
  Bottom 0.152: v126.19,45.41 v115.52,34.75 106.98,34.75 v102.87,38.86 | v37.8,92.96 12.65,92.96 v7.01,87.33 v7.01,81.69 7.01,80.92 3.96,77.88 3.96,43.28 7.42,39.82 7.42,37.34 7.78,36.98 9.14,36.98 13.26,32.86 13.26,31.78 13.8,31.25 14.32,31.25 v14.78,30.79 15.39,30.18 v17.98,30.18 | v40.84,27.28 43.13,24.99 v43.13,23.62 v51.21,15.54 v53.95,12.8
32KHZ  (via drill 0.35)
  Top 0.152: 77.57,39.93 77.57,42.06 80.62,45.11 80.62,47.7 U3.1 | 77.57,39.93 77.57,37.34 77.72,37.19 78.18,37.19 79.25,36.12 79.25,35.66 R2_PINH1.1 | v18.44,33.07 17.68,33.83 17.68,34.29 U2.9 | v33.07,18.44 50.29,18.44 62.64,30.79 62.64,32.46 70.1,39.93 77.57,39.93
  Bottom 0.152: v33.07,18.44 v18.44,33.07
DN
  Top 0.152: 142.49,39.62 142.34,39.47 142.34,38.86 142.49,38.71 143.1,38.71 J2.B7 | 142.49,39.62 143.1,39.62 J2.A7 | 142.49,39.62 137.16,39.62 D1.4
DP
  Top 0.152: J2.A6 143.26,39.17 143.87,39.17 144.02,39.32 144.02,39.93 143.87,40.08 143.26,40.08 J2.B6 143.1,40.08 141.73,40.08 140.36,41.45 137.16,41.45 D1.6
EPD_3V3  (via drill 0.35)
  Top 0.152: v67.21,18.59 66.45,19.36 Q2.2 | v69.8,19.36 70.71,19.36 71.63,20.27 C7.1 71.78,20.42 74.07,20.42 75.89,22.25 v80.92,22.25 | J1.16 74.52,11.73 74.83,11.73 J1.15 74.98,11.73 74.98,12.5 75.74,13.26 76.05,13.26 78.64,15.85 EPD_C5.1 | EPD_C5.1 | v97.69,42.22 106.22,50.75 126.95,50.75 TP17.TP | v80.31,14.94 80.31,15.54 EPD_C5.1 | v68.81,22.23 66.65,24.38
  Top 0.3: 66.65,24.38 L1.2
  Bottom 0.152: v69.8,19.36 69.04,18.59 v67.21,18.59 68.81,20.19 v68.81,22.23 | v97.69,42.22 97.69,36.88 81.99,21.18 | 81.99,21.18 80.31,19.51 v80.31,14.94 | 81.99,21.18 v80.92,22.25
EPD_3V3_C  (via drill 0.35)
  Top 0.152: v55.02,15.09 52.73,12.8 52.73,10.21 R_CL1.2 | v55.02,16.92 TP13.TP 59.13,21.03 59.13,21.34 60.2,22.4 | 60.2,22.4 64.47,22.4 65.53,21.34 66.29,21.34 Q2.1 | v44.5,44.2 44.04,44.2 38.1,50.14 21.64,50.14 20.27,51.51 20.27,51.82 U2.18 | 60.2,22.4 v59.89,22.71
  Bottom 0.152: v55.02,16.92 v55.02,15.09 | v44.5,44.2 44.5,38.1 v59.89,22.71
EPD_BUSY  (via drill 0.35)
  Top 0.152: v78.03,13.41 78.03,11.73 J1.9 | v10.16,50.14 10.06,50.24 10.06,51.82 U2.26 10.06,51.97 10.06,54.56 TP9.TP
  Bottom 0.152: v78.03,13.41 78.03,20.88 85.5,28.35 85.5,40.23 75.59,50.14 v10.16,50.14
EPD_CS  (via drill 0.35)
  Top 0.152: U2.11 20.27,34.29 20.27,30.48 21.49,29.26 TP10.TP 21.64,29.11 v35.81,29.11 | v76.05,12.65 76.35,12.34 76.35,11.73 J1.12 | v65.23,16.76 64.31,17.68 D6.2 64.16,17.68 62.03,15.54 58.22,15.54 57.61,14.94 57.61,12.95 57.76,12.8 | 57.76,12.8 57.91,12.65 58.98,12.65 60.2,11.43 R9.1 | 57.76,12.8 v56.24,11.28
  Bottom 0.152: v76.05,12.65 74.68,12.65 74.37,12.34 71.02,12.34 66.6,16.76 v65.23,16.76 | v35.81,29.11 36.27,29.11 54.1,11.28 v56.24,11.28
EPD_DC  (via drill 0.35)
  Top 0.152: v76.96,10.52 76.96,11.58 J1.11 | v49.38,19.2 21.34,19.2 11.43,29.11 TP11.TP 11.43,29.26 12.34,30.18 v12.65,30.18 | v12.65,32.61 12.65,34.29 U2.5
  Bottom 0.152: v76.96,10.52 76.66,10.82 76.66,10.97 76.35,11.28 75.29,11.28 73,8.99 60.35,8.99 56.08,13.26 55.32,13.26 v49.38,19.2 | v12.65,30.18 v12.65,32.61
EPD_RST  (via drill 0.35)
  Top 0.152: v78.94,15.24 77.42,13.72 77.42,11.73 J1.10 | U2.21 16.46,51.97 16.46,52.43 v17.37,53.34 16.61,54.1 16.61,57.15 TP12.TP
  Bottom 0.152: v78.94,15.24 78.94,21.34 85.95,28.35 85.95,40.54 76.05,50.44 20.27,50.44 v17.37,53.34
FLASH_CS  (via drill 0.35)
  Top 0.152: 42.22,25.15 43.13,26.06 D9.2 | 42.22,25.15 41.91,24.84 41.91,22.25 43.13,21.03 R5.1 | 26.82,40.23 21.49,34.9 21.49,34.44 U2.12 | 26.82,40.23 31.55,44.96 U1.1 | v42.06,25.15 42.22,25.15 | v27.58,39.62 26.98,40.23 26.82,40.23
  Bottom 0.152: v27.58,39.62 v42.06,25.15
GDR  (via drill 0.35)
  Top 0.152: v80.77,10.52 81.38,11.12 81.38,11.58 J1.2 | v65.99,16 65.99,18.44 R4.1 | v55.93,13.87 55.32,13.26 55.32,12.95 Q3.1
  Bottom 0.152: v80.77,10.52 77.88,10.52 76.81,11.58 74.52,11.58 72.39,9.45 68.73,9.45 65.99,12.19 65.99,13.87 | v65.99,16 65.99,13.87 | 65.99,13.87 v55.93,13.87
GND  (via drill 0.35)  (4 unrouted)
  Top 0.152: C2.2 137.16,7.47 135.94,7.47 C1.2 135.79,7.47 135.33,7.47 135.18,7.62 134.11,7.62 | 136.7,10.82 136.7,11.43 136.09,12.04 136.09,12.8 SENSOR2.1 135.94,12.95 118.87,30.02 118.72,30.02 | 136.7,10.82 136.7,10.06 SENSOR2.7 | 134.11,7.62 133.81,7.92 133.81,8.99 135.64,10.82 136.7,10.82 | 139.14,10.06 138.53,10.06 SENSOR2.5 | 139.14,10.06 145.24,16.15 J3.1 145.24,16.31 144.93,16.31 142.8,18.44 142.8,34.29 | 134.11,7.62 133.81,7.32 133.81,5.94 134.42,5.33 138.99,5.33 139.45,5.79 139.45,9.75 139.14,10.06 | R2-USB1.1 138.53,42.67 142.04,42.67 143.71,44.35 J2.MP4 143.87,44.5 147.68,44.5 J2.MP2 147.68,44.35 147.68,34.29 | 147.68,34.29 143.87,34.29 J2.MP3 | 147.68,34.29 J2.MP1 147.68,34.29 | R2-USB.2 130.91,41.15 132.28,41.15 132.74,40.69 134.57,40.69 D1.2 134.72,40.54 135.03,40.54 135.48,40.08 135.48,39.62 136.4,38.71 136.4,38.1 C5_USB.2 136.55,38.1 136.55,36.88 C4_USB.2 136.55,36.73 138.99,34.29 142.8,34.29 | 142.8,34.29 143.71,34.29 J2.MP3 | 142.8,34.29 J2.MP3 | MCP73831.2 113.08,39.32 113.39,39.32 114,38.71 114,38.1 112.17,36.27 108.05,36.27 C1_BAT.2 107.9,36.12 105.92,36.12 102.41,32.61 102.41,32 101.65,31.24 R2_BAT.1 | 118.72,41.15 118.42,41.15 U4.4 118.72,41.15 | 119.48,41.91 119.33,41.76 | 119.33,41.76 118.72,41.15 | 119.48,41.91 U4.9 | 119.48,41.91 118.72,42.67 118.42,42.67 U4.1 118.26,42.67 117.96,42.67 117.5,42.22 115.67,42.22 C1_BAT1.2 | 119.48,41.91 U4.9 | 119.33,41.76 120.24,41.76 U4.6 | 119.33,41.76 U4.9 | 101.65,28.96 101.65,27.28 103.02,25.91 | 101.65,28.96 101.65,31.09 R2_BAT.1 | 103.02,25.91 103.94,25.91 104.7,26.67 C2_BAT.2 104.85,26.67 105.77,27.58 112.93,27.58 C3.- 113.08,27.74 116.43,27.74 118.72,30.02
  Top 0.152: 107.29,29.87 106.68,30.48 IC4.2 | 107.29,29.87 107.29,29.11 107.14,28.96 101.65,28.96 | R1_PWRUSB.1 103.48,40.54 103.48,35.51 100.89,32.92 100.89,31.85 101.5,31.24 R2_BAT.1 | 107.29,29.87 107.59,30.18 110.03,30.18 111.86,32 114.3,32 115.06,31.24 116.74,31.24 C1_BAT2.2 | 118.72,41.15 118.72,36.58 118.87,36.42 118.87,30.18 118.72,30.02 | 87.48,8.99 83.06,8.99 J1.MP1 82.91,8.99 80.77,8.99 79.55,7.77 70.71,7.77 69.49,8.99 J1.MP2 69.34,8.99 64.92,8.99 64.47,8.53 | 87.48,8.99 88.85,7.62 TP5.TP | EPD_C1.2 58.52,13.41 59.59,13.41 EPD_C2.2 59.74,13.26 64.47,8.53 | 64.47,8.53 63.55,7.62 TP4.TP 63.4,7.62 63.25,7.47 55.93,7.47 R2.1 55.78,7.32 55.02,6.55 53.34,6.55 52.58,7.32 SJ1.1 52.58,9.14 51.97,9.75 51.97,11.58 52.43,12.04 52.43,13.41 56.69,17.68 57.61,17.68 60.05,20.12 60.05,21.79 60.35,22.1 64.01,22.1 64.77,21.34 64.77,21.03 R4.2 64.77,20.88 65.38,20.88 65.68,20.57 66.9,20.57 67.82,19.66 69.19,19.66 69.8,20.27 70.41,20.27 C7.2 70.56,20.42 73.3,23.16 v79.4,23.16 80.92,23.16 | 103.02,25.91 103.02,24.54 87.48,8.99 | C6.2 59.59,96.01 57.15,96.01 57,96.16 BOOT_BUTTON.1 56.84,96.16 53.49,96.16 BOOT_BUTTON.2 | RESET_BUTTON.1 42.98,96.16 43.13,96.01 44.35,96.01 C5.2 44.5,95.86 45.26,95.1 | 43.89,92.66 44.35,92.2 C_DELAY.2 | 43.89,92.66 43.59,92.96 41.45,92.96 41.3,92.81 41.3,92.35 39.78,90.83 39.62,90.83 39.32,90.53 IC1.3 | 45.26,95.1 45.26,94.03 43.89,92.66 | 45.26,95.1 47.09,96.93 52.73,96.93 53.34,96.32 BOOT_BUTTON.2 | 15.39,78.33 15.39,79.55 16.15,80.31 J4.G2 16.31,80.47 16.31,81.38 24.84,89.92 24.84,95.71 | 15.39,78.33 15.39,76.5 16.15,75.74 16.15,74.68 J4.G1
  Top 0.152: CHANGE_BUTTON.1 22.71,96.16 22.86,96.01 24.08,96.01 C10.2 24.23,95.86 24.38,95.71 24.84,95.71 | 24.84,95.71 37.19,95.71 | 37.19,95.71 38.86,95.71 39.32,96.16 RESET_BUTTON.2 | 37.19,95.71 37.19,90.98 38.56,89.61 44.96,89.61 51.05,95.71 52.58,95.71 53.03,96.16 53.34,96.16 BOOT_BUTTON.2 | 7.01,82.6 6.4,81.99 5.79,81.99 J4.P6 | 7.01,82.6 10.67,86.26 10.67,87.63 D12.1 | 5.33,81.84 2.13,78.64 2.13,71.78 J4.G3 | 5.33,81.84 5.64,81.84 J4.P6 | CHANGE_BUTTON.2 19.05,96.16 18.75,96.16 18.29,95.71 12.5,95.71 6.4,89.61 C9.2 6.25,89.46 3.05,86.26 3.05,84.89 J4.G4 3.05,84.73 3.05,84.43 5.33,82.14 5.33,81.84 | 5.33,81.84 J4.P6 | EPD_C11.2 82.45,17.07 82.75,17.07 84.58,15.24 85.65,15.24 85.8,15.39 85.8,16.46 85.19,17.07 EPD_C12.2 85.04,17.22 83.36,18.9 83.36,20.73 80.92,23.16 | 80.92,23.16 80.92,24.08 D3.1 | U2.29_3 12.04,42.98 13.11,42.98 U2.29_6 13.26,42.98 14.33,42.98 U2.29_9 14.48,42.82 14.48,41.76 U2.29_8 14.48,41.6 14.48,40.54 U2.29_7 14.33,40.54 13.26,40.54 U2.29_4 13.11,40.54 12.04,40.54 U2.29_1 | 11.89,40.54 11.89,41.6 U2.29_2 12.04,41.76 13.11,41.76 U2.29_5 | 11.89,40.54 11.89,38 v12.24,38 | 11.89,40.54 U2.29_1 | v8.03,37.59 7.47,37.03 7.47,34.44 U2.1 | 11.89,40.54 U2.29_1 | 32.46,41.3 33.68,41.3 35.51,43.13 U1.9 | 32.46,41.3 31.7,41.3 U1.4 | 32.46,36.73 31.85,36.12 D11.1 | 32.46,41.3 32.46,36.73 | v84.89,39.93 83.82,39.93 C8.2 | C10_SUPERCAP.1 86.26,38.25 v84.89,38.25 81.38,34.75 78.94,34.75 78.79,34.9 78.79,36.12 78.64,36.27 78.18,36.27 76.96,37.49 76.96,38.41 U3.13 | 43.89,25.3 43.89,26.82 43.74,26.98 42.67,26.98 42.37,26.67 42.37,26.36 40.69,24.69 D8.1
  Top 0.152: 43.89,25.3 43.28,24.69 D9.1 | 43.89,25.3 44.5,24.69 45.72,24.69 D10.1 45.72,24.54 v46.79,23.47 | EPD_C10.2 66.9,16 66.29,16.61 66.29,17.68 66.45,17.83 69.19,17.83 69.8,17.22 EPD_C9.2 69.95,17.22 72.39,17.22 EPD_C8.2 72.39,17.07 v73.91,17.07 74.83,17.07 EPD_C7.2 74.98,17.22 77.42,17.22 EPD_C6.2 77.57,17.22 80.01,17.22 EPD_C5.2 | v74.07,12.95 74.07,11.73 J1.17 | v65.38,18.14 64.92,18.59 63.55,18.59 62.79,17.83 D6.1 | v32.92,36.73 32.46,36.73 | 11.43,78.18 11.89,77.72 11.89,63.55 12.8,62.64 12.8,59.59 7.47,54.25 7.47,51.97 U2.28 7.44,52.09 5.62,53.91 v5.62,55.61 | 11.43,78.18 7.01,82.6 | v14.48,78.33 15.39,78.33 | 11.43,78.18 v11.58,78.33
  Bottom 0.152: v12.24,38 8.03,38 v8.03,37.59 | v84.89,39.93 v84.89,38.25 84.89,28.19 79.86,23.16 | 74.07,14.33 74.07,16.92 v73.91,17.07 73.91,17.22 79.86,23.16 | 74.07,14.33 v74.07,12.95 | 74.07,14.33 70.26,14.33 66.45,18.14 v65.38,18.14 60.96,18.14 55.63,23.47 v46.79,23.47 33.53,36.73 v32.92,36.73 32.77,36.73 27.69,41.81 23.58,41.81 14.78,33.01 14.78,31.91 14.43,31.55 13.92,31.55 13.57,31.91 13.57,36.67 v12.24,38 | 79.86,23.16 v79.4,23.16 | v11.58,78.33 v14.48,78.33 | v12.24,38 5.62,44.62 v5.62,55.61
GPIO8
  Top 0.152: R1.2 19.05,30.33 19.05,34.14 18.9,34.29 U2.10
I2C_PW  (via drill 0.35)
  Top 0.152: 135.79,9.75 135.94,9.91 SENSOR2.8 135.79,9.75 | 135.79,9.75 134.72,8.69 134.72,8.38 R1_PINH.2 | 137.16,6.25 135.94,6.25 C1.1 | 137.16,6.25 C2.1 137.16,6.25 | 137.62,9.6 138.53,8.69 138.53,8.38 R2_PINH.2 138.53,8.23 137.92,7.62 137.92,7.01 137.16,6.25 | 137.62,9.6 137.62,9.91 SENSOR2.6 | SENSOR2.6 137.47,10.06 137.47,11.12 136.85,11.73 136.85,12.8 SENSOR2.2 136.7,12.95 136.7,13.26 131.37,18.59 131.37,33.07 125.12,39.32 125.12,46.94 128.63,50.44 v128.63,51.21 | v22.55,53.34 21.49,52.27 21.49,51.97 U2.17 | 135.79,9.75 136.4,9.14 137.16,9.14 137.62,9.6 | 137.62,9.6 SENSOR2.6
  Bottom 0.152: v22.55,53.34 82.14,53.34 84.28,51.21 v128.63,51.21
INT_RTC  (via drill 0.35)
  Top 0.152: v16.31,32 16.31,34.29 U2.8 | v15.7,30.79 15.7,29.26 TP15.TP 15.7,29.11 17.22,29.11 25.76,20.57 39.78,20.57 40.39,19.96 42.52,19.96 42.67,19.81 49.53,19.81 72.39,42.67 76.81,42.67 80.01,45.87 80.01,51.36 80.16,51.51 81.23,51.51 v82.45,50.29 83.82,48.92 R1_PINH1.1 | v78.03,50.29 78.03,47.85 U3.3
  Bottom 0.152: v16.31,32 16.31,31.39 v15.7,30.79 | v78.03,50.29 v82.45,50.29
IO/BOOT
  Top 0.152: C6.1 59.59,94.64 57,94.64 BOOT_BUTTON.4 56.84,94.79 53.49,94.79 BOOT_BUTTON.3 53.34,94.79 53.19,94.94 52.12,94.94 R_BOOT.2 51.97,94.94 24.08,67.06 24.08,51.97 U2.15
IO/CHANGE
  Top 0.152: C10.1 24.08,94.64 22.71,94.64 CHANGE_BUTTON.4 22.55,94.79 20.88,94.79 20.12,95.56 | 20.12,95.56 20.12,96.77 19.96,96.93 18.14,96.93 18.14,96.77 17.83,96.47 R_CHANGE.2 | 20.12,95.56 19.2,94.64 CHANGE_BUTTON.3 19.05,94.64 13.87,89.46 13.87,51.97 U2.23
MISO  (via drill 0.35)
  Top 0.152: J4.P7 5.94,83.06 6.25,83.06 8.84,85.65 8.84,88.24 R8.1 8.99,88.39 11.28,88.39 12.04,87.63 D12.2 12.19,87.63 12.19,63.7 13.11,62.79 13.11,59.44 8.84,55.17 8.84,53.65 v9.14,53.34 9.14,52.27 8.84,51.97 U2.27 8.84,51.82 8.84,50.6 9.91,49.53 28.35,49.53 32.46,45.41 32.46,44.65 31.7,43.89 U1.2 | v19.05,63.25 19.05,67.21 TP6.TP
  Bottom 0.152: v9.14,53.34 v19.05,63.25
MOSI  (via drill 0.35)
  Top 0.152: 15.09,35.81 15.09,38.71 16.61,40.23 16.61,42.4 9.33,49.68 7.62,49.68 6.71,50.6 6.71,52.39 5.01,54.09 5.01,55.86 5.37,56.21 5.46,56.21 11.43,62.18 TP7.TP 11.43,62.33 11.43,73.91 6.71,78.64 5.94,78.64 J4.P3 | 15.09,35.81 15.09,34.44 U2.7 | v75.44,9.3 75.44,11.58 J1.14 | 30.63,35.36 30.63,35.66 30.18,36.12 R7.1 30.18,36.27 31.39,37.49 31.7,37.49 D11.2 | 30.63,35.36 v30.63,35.2 30.63,35.36 | 30.63,35.36 32.46,35.36 38.25,41.15 39.32,41.15 U1.5 | v21.49,35.81 15.09,35.81
  Bottom 0.152: v75.44,9.3 74.98,9.3 73.3,7.62 60.35,7.62 56.84,11.12 56.84,11.58 56.54,11.89 53.95,11.89 v30.63,35.2 30.02,35.81 v21.49,35.81
N$1
  Top 0.152: J1.22 71.48,11.73 71.48,13.87 71.17,14.17 71.17,15.7 70.41,16.46 67.67,16.46 67.06,17.07 EPD_C10.1
N$2
  Top 0.152: J1.20 72.39,11.73 EPD_C8.1
N$3
  Top 0.152: J1.18 73.46,11.73 73.46,13.26 76.05,15.85 77.42,15.85 EPD_C6.1
N$4
  Top 0.152: C4.1 86.26,24.69 84.89,24.69 84.43,24.23 D3.2 84.28,24.23 83.67,24.84 74.22,24.84 69.34,29.72 67.67,29.72 65.68,31.7 64.31,31.7 D4.1
N$5
  Top 0.152: J1.19 73,11.73 73,14.02 74.83,15.85 EPD_C7.1
N$6
  Top 0.152: J1.4 80.47,11.58 80.47,11.12 77.72,8.38 71.63,8.38 65.99,14.02 58.98,14.02 58.52,14.48 EPD_C1.1
N$7  (via drill 0.35)
  Top 0.152: v72.24,10.21 73.76,8.69 77.42,8.69 79.86,11.12 79.86,11.58 J1.5 | v67.97,14.48 59.74,14.48 EPD_C2.1
  Bottom 0.152: v67.97,14.48 v72.24,10.21
N$8  (via drill 0.35)
  Top 0.152: v133.5,39.93 130.91,39.93 R2-USB.1 | v142.04,40.69 142.49,41.15 143.1,41.15 J2.B5
  Bottom 0.152: v133.5,39.93 136.7,39.93 138.53,38.1 139.45,38.1 v142.04,40.69
N$9
  Top 0.152: R2-USB1.2 138.38,43.74 137.47,43.74 135.94,42.22 135.94,39.62 136.55,39.01 138.23,39.01 138.53,39.32 141.43,39.32 142.65,38.1 143.1,38.1 J2.A5
N$10  (via drill 0.35)
  Top 0.152: v70.56,14.94 70.56,11.73 J1.24 | v77.27,21.64 81.38,21.64 83.06,19.96 83.06,17.98 85.04,16 EPD_C12.1
  Bottom 0.152: v77.27,21.64 v70.56,14.94
N$11
  Top 0.152: 105.92,30.94 106.53,31.55 IC4.1 106.68,31.55 108.36,31.55 114.61,37.8 115.67,37.8 | 105.92,30.94 105.77,30.79 105.77,30.18 106.07,29.87 106.22,29.87 106.53,29.57 IC4.3 | 105.92,30.94 105.77,30.94 104.24,32.46 D2.1 | 115.67,37.8 116.28,37.19 116.43,37.19 117.65,35.97 Q1.2 | 115.67,37.8 115.67,40.69 C1_BAT1.1
N$13
  Top 0.152: R1_BAT.1 108.66,39.32 111.86,39.32 112.62,38.56 112.93,38.56 MCP73831.1
N$14
  Top 0.152: CHG_LED.C 107.14,40.54 107.14,39.62 107.29,39.47 R1_BAT.2
N$15
  Top 0.152: R2_BAT.2 101.65,32.46 107.59,38.41 110.34,38.41 MCP73831.5
N$17
  Top 0.152: IC1.5 42.06,92.35 42.82,92.35 44.35,90.83 C_DELAY.1
N$18
  Top 0.152: R_CAPACITOR.1 79.4,50.9 79.4,51.21 80.92,52.73 D7.1
PREVGH
  Top 0.152: EPD_C9.1 69.95,15.85 69.95,10.67 70.56,10.06 71.17,10.06 71.93,10.82 71.93,11.58 J1.21 71.93,11.73 71.93,13.87 71.63,14.17 71.63,16.31 71.78,16.46 80.47,16.46 80.77,16.76 80.77,20.27 D5.1
PREVGL  (via drill 0.35)
  Top 0.152: v70.87,10.67 70.87,11.58 J1.23 | v69.04,10.06 69.49,10.06 71.48,8.08 79.4,8.08 82.45,11.12 82.45,14.94 | 82.45,14.94 EPD_C11.1 | 82.45,14.94 85.8,14.94 87.48,16.61 87.48,26.06 81.84,31.7 67.82,31.7 D4.2
  Bottom 0.152: v70.87,10.67 69.65,10.67 v69.04,10.06
RESE
  Top 0.152: J1.3 80.92,11.73 80.92,16.46 81.69,17.22 81.69,20.88 81.53,21.03 75.13,21.03 72.85,18.75 68.12,18.75 66.6,20.27 63.55,20.27 R3.1 63.4,20.12 62.18,20.12 56.54,14.48 56.54,12.95 Q3.2
RESE'  (via drill 0.35)
  Top 0.152: 55.17,8.69 55.78,8.69 R2.2 | SJ1.2 55.17,8.69 | v60.66,21.49 63.4,21.49 R3.2 | v58.52,21.49 57.76,21.49 51.82,15.54 v51.82,12.34 | v54.86,9.3 54.86,8.99 55.17,8.69
  Bottom 0.152: v58.52,21.49 v60.66,21.49 | v54.86,9.3 v51.82,12.34
RESET  (via drill 0.35)
  Top 0.152: C5.1 44.35,94.64 42.98,94.64 RESET_BUTTON.4 42.82,94.79 41.15,94.79 40.39,95.56 | 40.39,95.56 40.39,96.77 40.23,96.93 38.56,96.93 38.1,96.47 R_RESET.2 | 40.39,95.56 39.47,94.64 RESET_BUTTON.3 39.32,94.64 39.32,92.51 IC1.1 39.17,92.35 38.86,92.05 v38.25,92.05 | U2.3 9.91,34.44 9.91,46.94 6.4,50.44 6.4,52.27 4.71,53.96 4.71,55.98 6.4,57.68 v6.4,60.2
  Bottom 0.152: v38.25,92.05 v6.4,60.2
RTC_RST
  Top 0.152: U2.16 22.71,51.82 22.71,51.51 23.32,50.9 40.08,50.9 41.15,51.97 73.15,51.97 76.81,48.31 76.81,47.85 U3.4
RX  (via drill 0.35)
  Top 0.152: v13.26,53.34 12.65,52.73 12.65,51.97 U2.24 | v72.54,89 73.61,90.07 TP2.TP
  Bottom 0.152: v13.26,53.34 16.46,53.34 52.12,89 v72.54,89
SCK  (via drill 0.35)
  Top 0.152: v4.88,77.72 4.57,78.03 4.57,80.16 5.18,80.77 5.79,80.77 J4.P5 | v21.79,77.72 25.3,81.23 TP8.TP | v76.05,10.67 76.05,11.58 J1.13 | R6.1 45.72,20.88 v46.79,20.88 47.4,21.49 47.4,24.38 45.72,26.06 D10.2 | 40.23,33.22 40.23,29.41 v39.93,29.11 | 40.23,33.22 40.23,41.76 39.47,42.52 U1.6 | v15.7,33.07 14.78,33.07 13.87,33.98 13.87,34.29 U2.6 14.17,34.05 v14.17,32.16 | 40.23,33.22 v31.7,33.22
  Bottom 0.152: v21.79,77.72 5.79,77.72 | 5.79,77.72 v4.88,77.72 | v76.05,10.67 75.29,9.91 75.13,9.91 73.15,7.92 60.5,7.92 57.15,11.28 57.15,11.73 56.69,12.19 55.47,12.19 v46.79,20.88 46.79,22.25 v39.93,29.11 | v15.7,33.07 17.53,33.07 18.14,33.68 31.24,33.68 v31.7,33.22 | v14.17,32.16 14.17,44.96 7.5,51.63 7.5,54.59 5.79,56.3 5.79,77.72
SCL  (via drill 0.35)
  Top 0.152: v130.76,32.77 124.05,39.47 | 124.05,39.47 121.46,42.06 120.4,42.06 U4.7 | v144.02,19.51 145.09,19.51 145.24,19.36 J3.4 | v138.68,5.94 138.68,6.86 R2_PINH.1 | v139.14,12.95 138.38,12.95 SENSOR2.4 | v76.35,43.59 44.2,43.59 37.95,49.84 19.36,49.84 17.68,51.51 17.68,51.82 U2.20 | U3.16 80.62,38.56 80.01,39.17 v80.01,39.93 81.84,41.76 v81.84,47.4 | 124.05,39.47 124.66,40.08 124.66,40.69 v117.96,47.4
  Bottom 0.152: v130.76,32.77 v144.02,19.51 138.68,14.17 138.68,12.95 | 138.68,12.95 v138.68,5.94 | 138.68,12.95 v139.14,12.95 | v80.01,39.93 v76.35,43.59 | v81.84,47.4 v117.96,47.4
SDA  (via drill 0.35)
  Top 0.152: v124.05,40.39 121.77,42.67 120.4,42.67 U4.8 | v143.41,21.03 143.41,19.2 144.32,18.29 145.24,18.29 J3.3 | v134.72,5.94 134.72,6.86 R1_PINH.1 | v139.29,11.12 138.99,11.12 137.62,12.5 137.62,12.8 SENSOR2.3 | v19.96,53.34 18.9,52.27 18.9,51.97 U2.19 | v81.23,46.18 81.23,42.06 79.4,40.23 79.4,38.56 U3.15
  Bottom 0.152: v134.72,5.94 137.77,5.94 138.38,5.33 138.99,5.33 142.04,8.38 | 142.04,8.38 144.63,10.97 144.63,19.81 v143.41,21.03 v124.05,40.39 122.07,40.39 111.56,29.87 110.95,29.87 94.79,46.02 94.79,46.48 94.49,46.79 81.84,46.79 v81.23,46.18 80.77,46.18 76.2,50.75 24.23,50.75 21.64,53.34 v19.96,53.34 | 142.04,8.38 v139.29,11.12
SRC  (via drill 0.35)
  Top 0.152: D5.2 84.43,20.42 87.17,23.16 87.17,25.15 86.41,25.91 C4.2 86.26,26.06 73.46,26.06 68.43,31.09 66.75,31.09 65.38,32.46 63.55,32.46 63.25,32.16 63.25,31.09 65.68,28.65 | v61.72,20.88 55.93,15.09 Q3.3 | 65.68,28.65 65.99,28.96 L1.1 | v66.19,26.62 66.95,27.38 65.68,28.65
  Bottom 0.152: v61.72,20.88 62.79,20.88 66.19,24.28 v66.19,26.62
SS_SD  (via drill 0.35)
  Top 0.152: D8.2 40.69,26.21 42.22,27.74 45.41,27.74 48.01,25.15 48.01,20.42 47.7,20.12 42.82,20.12 42.06,20.88 40.69,20.88 R10.1 40.54,21.03 25.76,21.03 16.31,30.48 16.31,31.09 15.85,31.55 12.8,31.55 11.28,33.07 11.28,34.29 U2.4 10.66,33.84 10.66,33.59 9.25,32.17 v9.25,28.19 | J4.P2 6.4,77.42 7.01,76.81 7.01,61.72 5.67,60.39 5.67,57.38 4.4,56.11 4.4,53.83 6.03,52.21 6.03,28.48 v5.59,28.04
  Bottom 0.152: v9.25,28.19 5.74,28.19 v5.59,28.04
TX  (via drill 0.35)
  Top 0.152: v13.26,54.25 11.28,52.27 11.28,51.97 U2.25 | v47.4,88.39 79.55,88.39 81.23,90.07 TP1.TP
  Bottom 0.152: v47.4,88.39 v13.26,54.25
USB_D+  (via drill 0.35)
  Top 0.152: v132.74,41.6 134.57,41.6 D1.1 | v39.62,49.53 v41.45,51.36 | v29.57,40.84 29.57,39.93 24.08,34.44 U2.14
  Bottom 0.152: v132.74,41.6 131.98,41.6 124.51,49.07 78.33,49.07 76.05,51.36 v41.45,51.36 | v39.62,49.53 38.25,49.53 v29.57,40.84
USB_D-  (via drill 0.35)
  Top 0.152: v131.98,29.72 134.57,32.31 134.57,39.62 D1.3 | v91.29,29.57 84.43,29.57 v80.16,33.83 | v35.05,37.03 34.59,37.03 30.94,33.38 23.47,33.38 22.55,34.29 U2.13
  Bottom 0.152: v131.98,29.72 112.93,29.72 112.78,29.57 v91.29,29.57 | v80.16,33.83 74.22,33.83 63.09,44.96 42.98,44.96 v35.05,37.03
VBAT
  Top 0.152: U4.2 118.42,42.06 118.42,41.76 U4.3 118.26,41.6 117.96,41.6 117.04,40.69 | 116.89,37.95 118.57,36.27 118.57,30.33 117.35,29.11 111.86,29.11 111.4,28.65 105.61,28.65 103.63,26.67 C2_BAT.1 | 116.89,37.95 Q1.3 116.89,37.95 | 117.04,40.69 116.89,40.54 116.89,37.95 | 117.04,40.69 116.28,41.45 115.06,41.45 114,40.39 113.08,40.39 MCP73831.3 112.93,40.39 111.71,41.6 93.88,41.6 82.6,52.88 82.6,90.68 81.84,91.44 73.15,91.44 71.93,90.22 66.14,90.22 TP3.TP
VBUS  (via drill 0.35)
  Top 0.152: C4_USB.1 137.77,36.88 137.77,38.1 C5_USB.1 137.92,38.1 138.23,38.1 v138.84,38.71 | v138.38,40.23 137.47,40.23 137.16,40.54 D1.5 137.01,40.69 136.7,40.69 136.25,41.15 136.25,42.06 137.31,43.13 138.99,43.13 139.14,43.28 139.14,44.35 138.99,44.5 132.89,44.5 130,41.6 130,37.64 130.76,36.88 TP14.TP 130.91,36.73 132.28,35.36 132.28,33.07 PFMF.050.1.2 | D2.2 104.09,30.63 104.09,31.39 103.33,32.16 103.33,33.07 105.16,34.9 107.9,34.9 C1_BAT.1 108.05,35.05 108.51,35.05 v109.12,35.66 | v114.76,37.03 115.82,35.97 Q1.1 | v111.71,40.08 110.64,40.08 110.49,40.23 MCP73831.4 110.34,40.39 110.19,40.54 108.66,40.54 CHG_LED.A 108.51,40.69 107.9,41.3 106.53,41.3 105.92,40.69 104.85,40.69 R1_PWRUSB.2
  Bottom 0.152: v138.84,38.71 138.84,39.78 v138.38,40.23 134.11,40.23 133.35,41 131.52,41 126.03,46.48 124.21,46.48 v114.76,37.03 112.62,39.17 | v111.71,40.08 112.62,39.17 | 112.62,39.17 v109.12,35.66
VRTC
  Top 0.152: R_CAPACITOR.2 80.77,50.75 80.77,49.38 86.26,43.89 86.26,40.54 C10_SUPERCAP.2 86.26,40.39 84.73,38.86 83.82,38.86 C8.1 83.21,38.71 81.69,37.19 79.1,37.19 78.18,38.1 78.18,38.41 U3.14
VUSB  (4 unrouted)